# Altium PCB PCB3.PcbDoc
Units mil, origin at the board's own origin, x right, y up, seen from the top; angles counter-clockwise.
Board outline 6000 x 4000 mil, 2 copper layers (Top Layer, Bottom Layer); 46 components, 53 nets, 192 pads, 21 vias.
Unrouted connection lines stored in the file: 2.
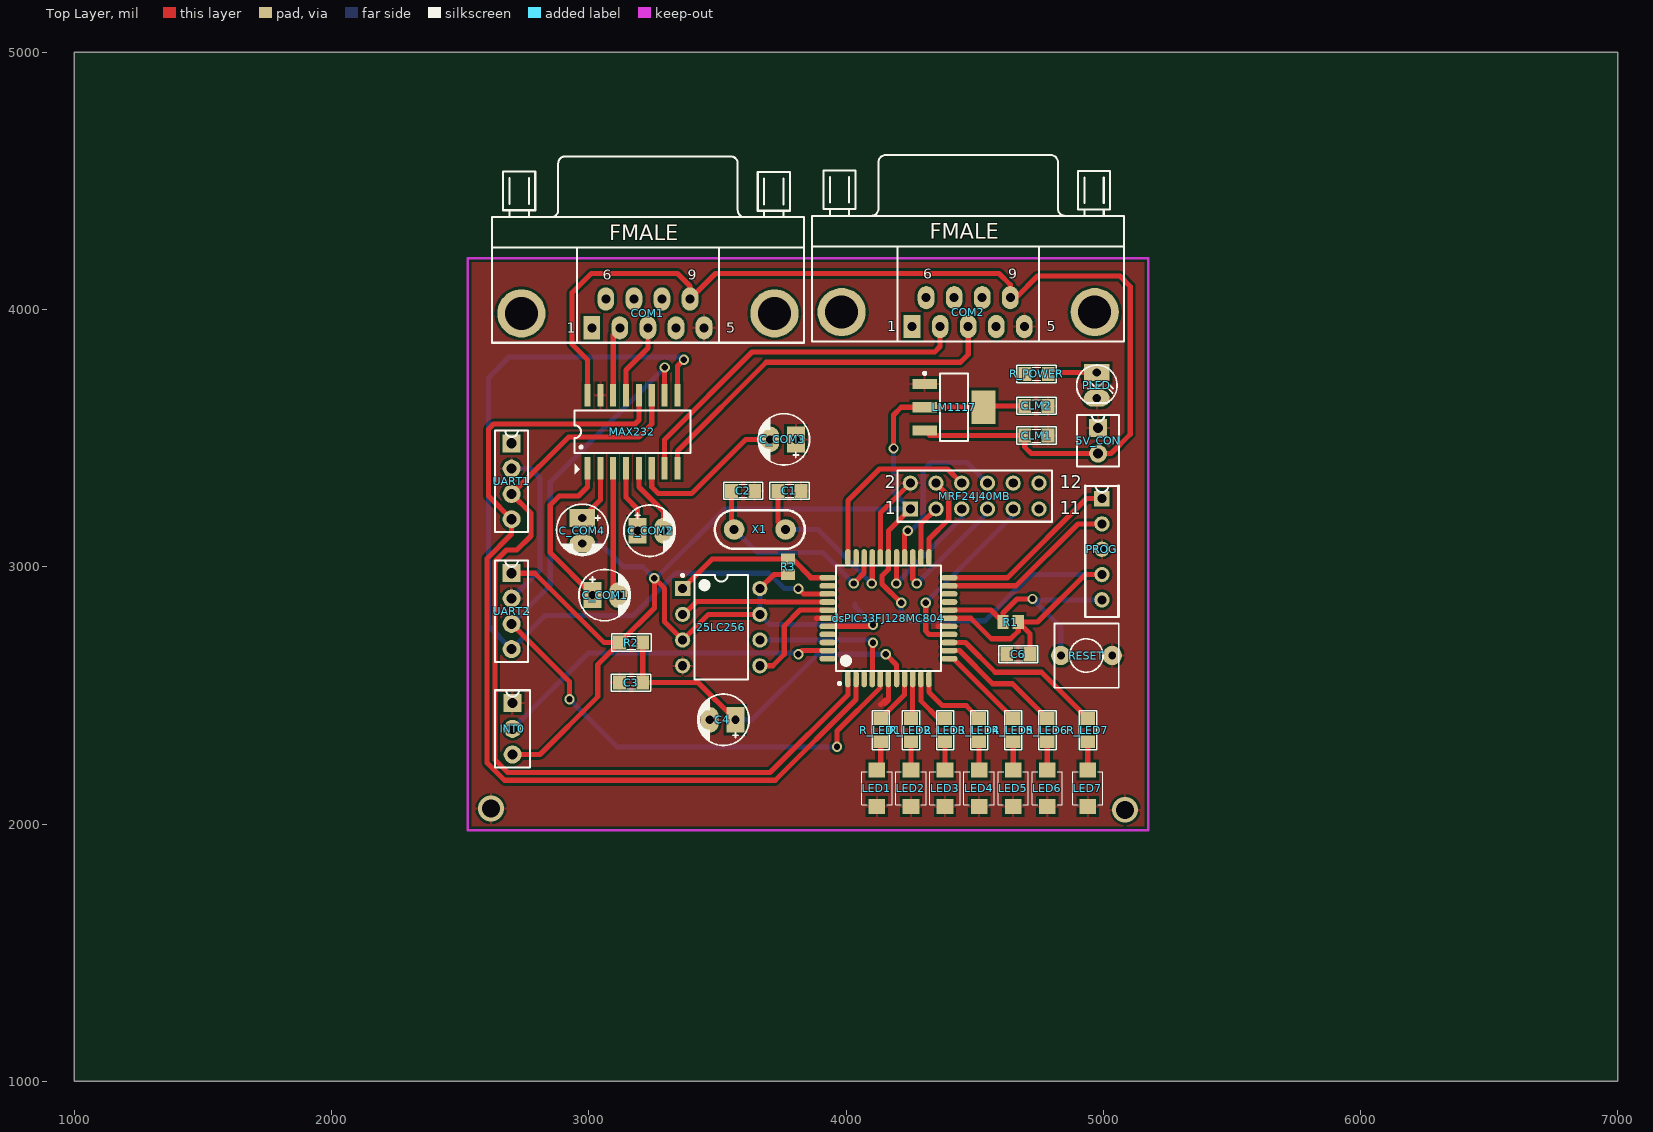
[diagram p0: Top Layer view]
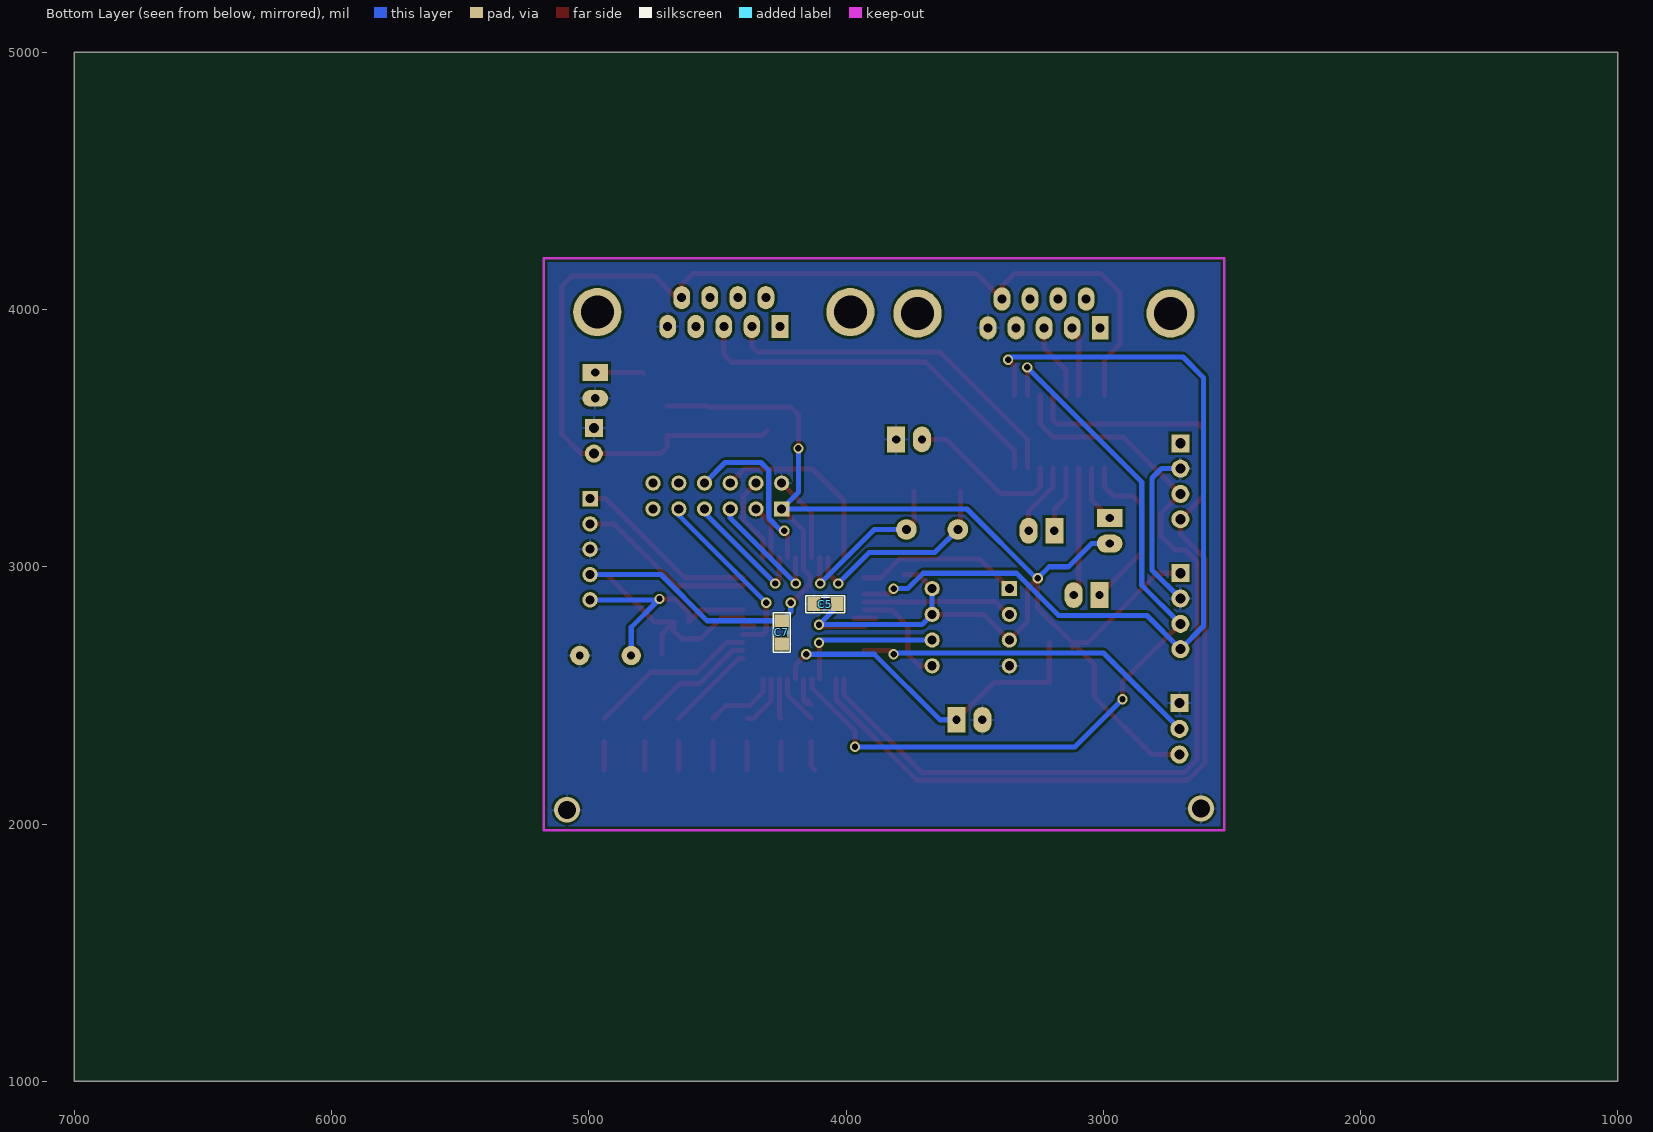
[diagram p1: Bottom Layer view, seen from below]
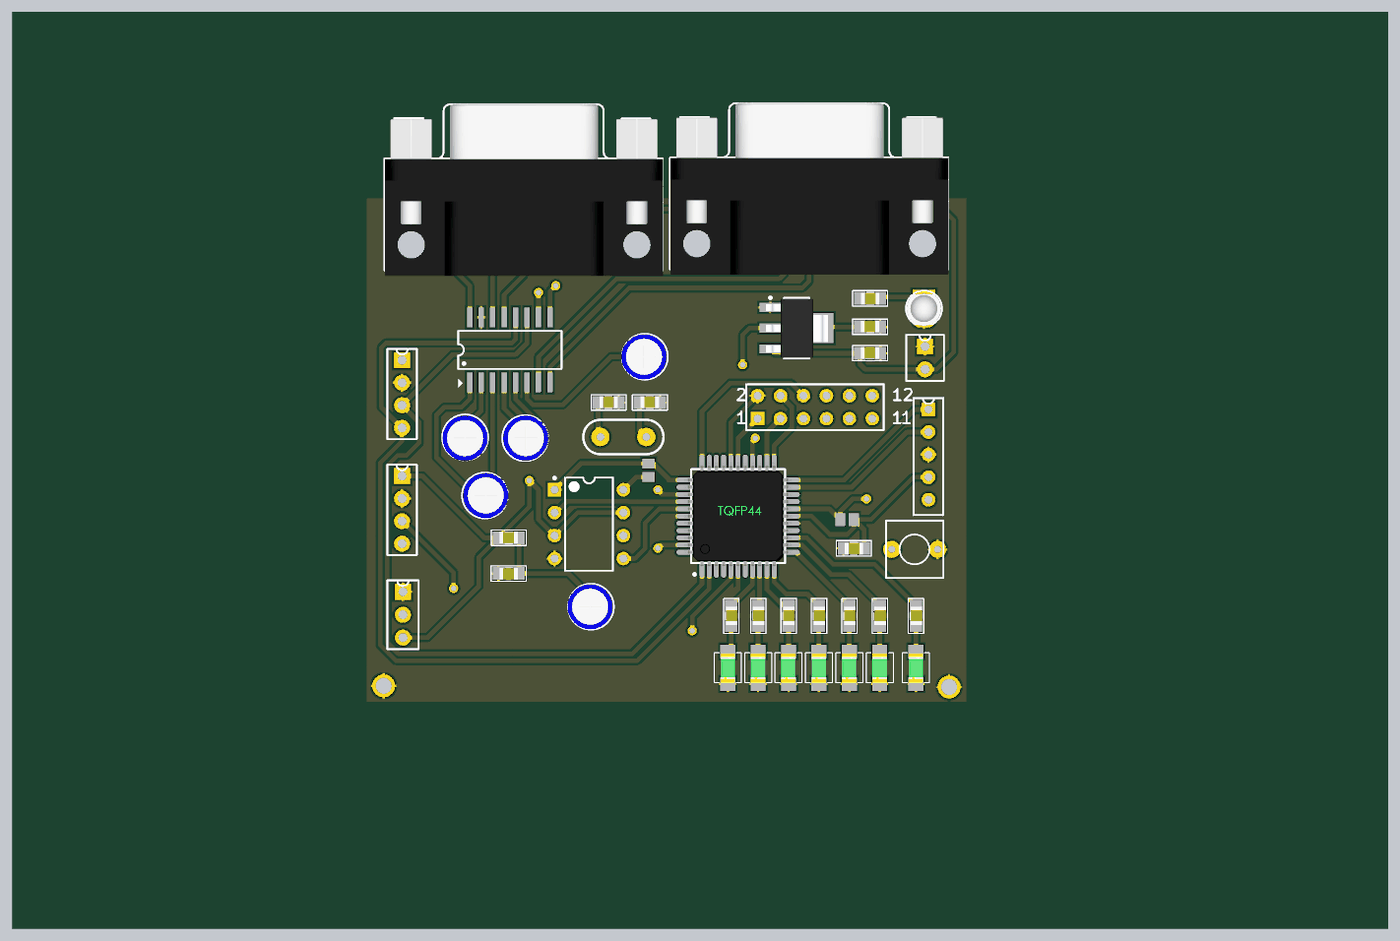
[diagram p2: 3D render of the assembled board from above, using the file's embedded part models]

## Layer stack, top to bottom
Top Layer: signal copper 1.4
Dielectric: dielectric 12.6, FR-4, Dk 4.8
Bottom Layer: signal copper 1.4

## Board outline
1000,1000 7000,1000 7000,5000 1000,5000

## Design rules (kind name [scope] priority, off if disabled: settings)
Clearance CVCC [InNet('VCC')] p1: gap=10
Clearance [All] p2: gap=10
PolygonConnect [All] p1: connectstyle=Relief reliefconductorwidth=10 reliefentries=4 polygonreliefangle="90 Angle"
RoomDefinition Sheet2 [InComponentClass('Sheet2')] p1: confinementstyle=ConfineIn formatcopy=TRUE lockcomponents=FALSE outline 7045,1055 23820,1055 23820,2395 7045,2395
RoutingVias [All] p1: holewidth=28 width=50 viastyle="Through Hole" minholewidth=28 minwidth=50 maxholewidth=28 maxwidth=50
SilkscreenOverComponentPads [All] p1: minsilkscreentomaskgap=10
SolderMaskExpansion [All] p1: expansion=4
Width [All] p1: maxlimit=20 minlimit=10 preferedwidth=20
27 further rules are at their usual default settings.

## Components (designator, comment, footprint, x,y, rotation, side; value= is the part's Value field where it differs from the comment)
5V_CON "JP2" CON2 4980,3540 r0 top
25LC256 "25LC256" DIP-8 3515,2765 r0 top
C1 "103" SM-0805 3780,3295 r180 top
C2 "103" SM-0805 3600,3295 r180 top
C3 "104" SM-0805 3165,2550 r0 top
C4 "10uF" CP1/2 3570,2405 r180 top
C5 "104" SM-0805 4080,2855 r180 bottom
C6 "104" SM-0805 4670,2660 r0 top
C7 "104" SM-0805 4250,2745 r90 bottom
C_COM1 "1uF" CP1/2 3015,2890 r0 top
C_COM2 "1uF" CP1/2 3190,3140 r0 top
C_COM3 "1uF" CP1/2 3805,3495 r180 top
C_COM4 "1uF" CP1/2 2975,3190 r270 top
CLM1 "104" SM-0805 4740,3510 r180 top
CLM2 "104" SM-0805 4740,3625 r180 top
COM1 "COM 9 FMALE" "DSB 9-F" 3230,3985 r0 top
COM2 "COM 9 FMALE" "DSB 9-F" 4475,3990 r0 top
dsPIC33FJ128MC804 "DSPIC33FJ128MC804T-E/PT" TQFP44-10x10-P0.8 4165,2800 r90 top
INT0 "JP3" CON3 2703.94,2470 r0 top
LED1 "LED" SM-LED-Red 4120,2210 r270 top
LED2 "LED" SM-LED-Red 4252.5,2210 r270 top
LED3 "LED" SM-LED-Red 4385,2210 r270 top
LED4 "LED" SM-LED-Red 4517.5,2210 r270 top
LED5 "LED" SM-LED-Red 4650,2210 r270 top
LED6 "LED" SM-LED-Red 4782.5,2210 r270 top
LED7 "LED" SM-LED-Red 4940,2210 r270 top
LM1117 "LM1117" SOT223-4N 4420,3620 r0 top
MAX232 "MAX232" SOP16 3170,3525 r0 top
MRF24J40MB "Header 6X2" HDR2X6 4250,3225 r0 top
PLED "LED" LED-3 4975,3755 r270 top
PROG "JP5" CON5 4995,3265 r0 top
R1 "10k" C0805 4640,2785 r180 top
R2 "1k" SM-0805 3165,2705 r180 top
R3 "Res Semi" C0805 3775,3000 r270 top
R_LED1 "1k" SM-0805 4135,2365 r90 top
R_LED2 "1k" SM-0805 4252.5,2365 r90 top
R_LED3 "1k" SM-0805 4385,2365 r90 top
R_LED4 "1k" SM-0805 4517.5,2365 r90 top
R_LED5 "1k" SM-0805 4650,2365 r90 top
R_LED6 "1k" SM-0805 4782.5,2365 r90 top
R_LED7 "1k" SM-0805 4940,2365 r90 top
R_POWER "1k" SM-0805 4741,3750 r0 top
RESET "SW" SW2 4835,2655 r0 top
UART1 "JP4" CON4 2700,3480 r0 top
UART2 "JP4" CON4 2700,2975 r0 top
X1 "4Mhz" "THACH ANH 12MHz" 3665,3145 r180 top

## Footprints (in the part's own frame and the unit in brackets; to place one, negate y for a bottom-side part, rotate by r counter-clockwise, add the part's x,y. Pads: shape width x height; smd on the part's side, far side on the other; paste and mask are expansions set on the pad)
C0805 [mm] "Chip Capacitor, Body 2.0x1.3mm, IPC High Density"
  rect 1.1x1.4 smd: 1(-0.75,0) 2(0.75,0)
  body extent -1.1,-0.72 1.1,0.72, height 1.4
CON2 [mil]
  rect 70x70 hole 39.37 unplated: 1(0,0)
  round 70 hole 39.37 unplated: 2(0,-100)
  silkscreen extent -82,-150 82,50
CON3 [mil]
  rect 70x70 hole 39.37 unplated: 1(0,0)
  round 70 hole 39.37 unplated: 2(0,-100) 3(0,-200)
  silkscreen extent -68,-250 68,50
CON4 [mil]
  rect 70x70 hole 39.37 unplated: 1(0,0)
  round 70 hole 39.37 unplated: 2(0,-98.43) 3(0,-196.85) 4(0,-295.28)
  silkscreen extent -64,-344 64,49
CON5 [mil]
  rect 60x60 hole 35: 1(0,0)
  round 60 hole 35: 2(0,-98.43) 3(0,-196.85) 4(0,-295.28) 5(0,-393.7)
  silkscreen extent -64,-460 64,49
CP1/2 [mil] "Tu hoa < 22uF/16>50V"
  rect 70x100 hole 32: 1(0,0)
  oval 70x100 hole 32: 2(100,0)
  silkscreen extent -53,-100 147,100, body extent -49,-99 149,99, height 287
DIP-8 [mm] "DIP; 8 Leads; Row Spacing 7.62 mm; Pitch 2.54 mm"
  rect 1.5x1.5 hole 0.9: 1(-3.81,3.81)
  round 1.5 hole 0.9: 2(-3.81,1.27) 3(-3.81,-1.27) 4(-3.81,-3.81) 5(3.81,-3.81) 6(3.81,-1.27) 7(3.81,1.27) 8(3.81,3.81)
  silkscreen extent -3.93,-5.15 2.65,5.23, body extent -3.6,-5.15 3.6,5.15, height 5.08
"DSB 9-F" [mil] "COM FMALE - D Subminiature; 9 Position; Right Angle; Pitch 1.385 mm"
  rect 65x90 hole 35: 1(-218.11,-55.91)
  oval 65x90 hole 35: 2(-109.05,-55.91) 3(0,-55.91) 4(109.05,-55.91) 5(218.11,-55.91) 6(-163.58,55.91) 7(-54.53,55.91) 8(54.53,55.91) 9(163.58,55.91)
  round 187.4 hole 128.35: 10(-491.93,0) 11(491.93,0)
  silkscreen extent -606,-114 606,610, body extent -604,-138 608,613, height 495
HDR2X6 [mm] "Connector; Header; 6x2 Position"
  rect 1.5x1.5 hole 0.9: 1(0,0)
  round 1.5 hole 0.9: 2(0,2.54) 3(2.54,0) 4(2.54,2.54) 5(5.08,0) 6(5.08,2.54) 7(7.62,0) 8(7.62,2.54) 9(10.16,0) 10(10.16,2.54) 11(12.7,0) 12(12.7,2.54)
  silkscreen extent -1.27,-1.27 13.97,3.81
LED-3 [mil] "LED 2 PIN, 3ly Only colour"
  rect 65x100 hole 32: 1(0,0)
  oval 65x100 hole 32: 2(100,0)
  silkscreen extent -29,-78 118,79, body extent -13,-75 125,75, height 217
SM-0805 [mil] "Compoment SMD 80x50mil"
  rect 50x55 smd: 1(-45,0) 2(45,0)
  silkscreen extent -77,-34 76,33, body extent -40,-27 40,23, height 24
SM-LED-Red [mil]
  rect 60x65 smd: 1(0,0) 2(142,0)
  silkscreen extent 6,-59 136,59, body extent 10,-32 136,31, height 44
SOP16 [mm] "Small Outline; 16 Leads; Body Width 5.6 mm; Pitch 1.27 mm"
  rect 0.6x2.2 smd: 1(-4.445,-3.6) 2(-3.175,-3.6) 3(-1.905,-3.6) 4(-0.635,-3.6) 5(0.635,-3.6) 6(1.905,-3.6) 7(3.175,-3.6) 8(4.445,-3.6) 9(4.445,3.6) 10(3.175,3.6) 11(1.905,3.6) 12(0.635,3.6) 13(-0.635,3.6) 14(-1.905,3.6) 15(-3.175,3.6) 16(-4.445,3.6)
  silkscreen extent -5.73,-4.19 5.73,2.1
SOT223-4N [mm] "SOT223, 4-Leads, Body 6.5x3.5mm, Pitch 2.3mm, Lead Span 7mm, IPC Medium Density"
  rect 2.4x1 smd: 1(-2.9,2.3) 2(-2.9,0) 3(-2.9,-2.3)
  rect 2.4x3.3 smd: 4(2.9,0)
  silkscreen extent -3.02,-3.35 1.4,3.47, body extent -3.39,-3.27 3.5,3.23, height 1.72
SW2 [mil] "SW button 2pin, 250x 250 mil"
  round 75 hole 31: 1(0,0) 2(200,0)
  silkscreen extent -25,-125 225,125
"THACH ANH 12MHz" [mil]
  round 80 hole 34: 1(-100,0) 2(100,0)
  silkscreen extent -175,-75 175,75
TQFP44-10x10-P0.8 [mm] "QFP, 44-Leads, Body 10x10mm, Pitch 0.8mm, IPC High Density"
  oval 1.65x0.55 smd: 1(-6,4) 2(-6,3.2) 3(-6,2.4) 4(-6,1.6) 5(-6,0.8) 6(-6,0) 7(-6,-0.8) 8(-6,-1.6) 9(-6,-2.4) 10(-6,-3.2) 11(-6,-4) 23(6,-4) 24(6,-3.2) 25(6,-2.4) 26(6,-1.6) 27(6,-0.8) 28(6,0) 29(6,0.8) 30(6,1.6) 31(6,2.4) 32(6,3.2) 33(6,4)
  oval 0.55x1.65 smd: 12(-4,-6) 13(-3.2,-6) 14(-2.4,-6) 15(-1.6,-6) 16(-0.8,-6) 17(0,-6) 18(0.8,-6) 19(1.6,-6) 20(2.4,-6) 21(3.2,-6) 22(4,-6) 34(4,6) 35(3.2,6) 36(2.4,6) 37(1.6,6) 38(0.8,6) 39(0,6) 40(-0.8,6) 41(-1.6,6) 42(-2.4,6) 43(-3.2,6) 44(-4,6)
  silkscreen extent -6.57,-5.2 5.2,5.2, body extent -5.99,-5.99 6.01,6.01, height 1.07

## Part data
5V_CON: library part Con2, "Connector 2"
C1 C2 C3 C5 C6 C7: library part CM, "Cap SMD"
C4 C_COM1 C_COM2 C_COM3 C_COM4: library part CP1, "Cap P  0,1uF < 22uF , 16 - 50V"
CLM1 CLM2: library part CN2, "Cap np 104 => 105pF"
COM1 COM2: library part DSB9F, "COM 9"
dsPIC33FJ128MC804: "High-Performance 16-bit Digital Signal Controller, 128 KB Flash, 16 KB RAM, 44-Pin TQFP, Extended High Temperature, Tape and Reel"
INT0: library part Con3, "Connector 3"
LED1 LED2 LED3 LED4 LED5 LED6 LED7 PLED: "LED Single colour Green and Red"
LM1117: "3v3"
MAX232: "Dual EIA-232 Driver/Receiver"
MRF24J40MB: "Header, 6-Pin, Dual row"
PROG: library part Con5, "Connector 5"
R1 R2 R_LED1 R_LED2 R_LED3 R_LED4 R_LED5 R_LED6 R_LED7 R_POWER: library part R, "Resistor 1/4W"
R3: "Semiconductor Resistor"
RESET: library part SW4, "Switch button 4 pin"
UART1 UART2: library part Con4, "Connector 4"
X1: library part XT2, "Crystal For all Crystal 2pin."

## Via types
v1: diameter 40, hole 25, Top Layer to Bottom Layer, 18 vias
v2: diameter 100, hole 70, Top Layer to Bottom Layer, 2 vias
v3: diameter 40/40 (per signal layer), hole 25, Top Layer to Bottom Layer, 1 vias

## Nets (pads, with @x,y where several pads share a name; then routed paths per layer and width w, separated by ;. In a path a pad name is that pad's centre, name@x,y a point inside that pad or via, vN(x,y) a via of type N, cw(c..) or ccw(c..) an arc to the next point about the centre after c; other vN are vias at no path point)
5V: 5V_CON.2 CLM1.2 COM1.9 COM2.9 LM1117.3 MAX232.16 | length 4324.5
  Top Layer w20: MAX232.16 2995,3805 2935,3865 2935,4065 3010,4140 3345,4140 3393.58,4091.42 COM1.9 3492.68,4140 4595,4140 4638.58,4096.42 COM2.9 4660.91,4045.91 4745,4130 5065,4130 5105,4090 5105,3515 5030,3440 5V_CON.2 4720,3440 4695,3465 CLM1.2 4325.28,3510 LM1117.3
AN0: dsPIC33FJ128MC804.19
AN1: dsPIC33FJ128MC804.20
CS1: dsPIC33FJ128MC804.33 MRF24J40MB.6 | length 737.3
  Top Layer w20: dsPIC33FJ128MC804.33 4007.52,3257.52 4130,3380 4395,3380 MRF24J40MB.6
CS2: 25LC256.1 dsPIC33FJ128MC804.34 R3.1 | length 663.3
  Top Layer w20: 25LC256.1@3385.47,2915 25LC256.1 3479.53,3029.53 R3.1 3793.44,3029.53 3862.52,2960.45 3862.52,2957.48 dsPIC33FJ128MC804.34
GND: 5V_CON.1 25LC256.4 C1.1 C2.1 C3.1 C4.2 C5.1 C6.1 C7.1 C_COM3.1 CLM1.1 CLM2.1 COM1.5 COM2.5 dsPIC33FJ128MC804.6 dsPIC33FJ128MC804.16 dsPIC33FJ128MC804.29 dsPIC33FJ128MC804.39 INT0.1 LED1.2 LED2.2 LED3.2 LED4.2 LED5.2 LED6.2 LED7.2 LM1117.1 MAX232.15 MRF24J40MB.2 PLED.2 PROG.3 RESET.2 UART1.2 UART2.2 | length 1242.3
  Top Layer w20: 3885,2800 dsPIC33FJ128MC804.39 3969.18,2800 ; dsPIC33FJ128MC804.29 4133.5,3208.5 MRF24J40MB.2 ; 4135,2464 4153.43,2482.43 4165,2482.43 ; 4151.39,2468.82 4165,2482.43 ; dsPIC33FJ128MC804.6 4165,2482.43 ; 4357.5,2768.5 dsPIC33FJ128MC804.16
  Bottom Layer w20: UART2.2 2810,2986.57 2810,3345 2773.43,3381.57 UART1.2
  other v2: 5085,2055 2620,2060
INT0: dsPIC33FJ128MC804.43 INT0.2 | length 1354.5
  Top Layer w20: v1(3815,2660) 3829.02,2674.02 dsPIC33FJ128MC804.43
  Bottom Layer w20: INT0.2 2998.46,2664.53 3810.47,2664.53 v1(3815,2660)
INT1: dsPIC33FJ128MC804.27 MRF24J40MB.5 | length 497.5
  Top Layer w20: v1(4195,2935) 4196.5,2936.5 dsPIC33FJ128MC804.27
  Bottom Layer w20: v1(4195,2935) 4450,3190 MRF24J40MB.5
LED1: dsPIC33FJ128MC804.8 R_LED1.2 | length 192.3
  Top Layer w20: R_LED1.2 4227.32,2502.32 4227.32,2563.11 dsPIC33FJ128MC804.8
LED2: dsPIC33FJ128MC804.9 R_LED2.2 | length 156.7
  Top Layer w20: R_LED2.2 4258.82,2416.32 4258.82,2563.11 dsPIC33FJ128MC804.9
LED3: dsPIC33FJ128MC804.10 R_LED3.2 | length 207.4
  Top Layer w20: dsPIC33FJ128MC804.10 4290.98,2479.02 4360,2410 R_LED3.2
LED4: dsPIC33FJ128MC804.11 R_LED4.2 | length 288.7
  Top Layer w20: dsPIC33FJ128MC804.11 4322.48,2512.52 4375,2460 4467.5,2460 R_LED4.2
LED5: dsPIC33FJ128MC804.12 R_LED5.2 | length 345.1
  Top Layer w20: dsPIC33FJ128MC804.12 4417.48,2642.52 R_LED5.2
LED6: dsPIC33FJ128MC804.13 R_LED6.2 | length 490.6
  Top Layer w20: dsPIC33FJ128MC804.13 4440.98,2674.02 4570,2545 4647.5,2545 R_LED6.2
LED7: dsPIC33FJ128MC804.14 R_LED7.2 | length 661.2
  Top Layer w20: dsPIC33FJ128MC804.14 4464.49,2705.51 4580,2590 4760,2590 R_LED7.2
NetC_COM1_1: C_COM1.1 MAX232.1 | length 665.6
  Top Layer w20: MAX232.1 2995,3310 2960,3275 2885,3275 2850,3240 2850,3055 C_COM1.1
NetC_COM1_2: C_COM1.2 MAX232.3 | length 501.6
  Top Layer w20: MAX232.3 3095,2910 C_COM1.2
NetC_COM2_1: C_COM2.1 MAX232.4 | length 261.9
  Top Layer w20: MAX232.4 3145,3270 3190,3225 C_COM2.1
NetC_COM2_2: C_COM2.2 MAX232.5 | length 282.6
  Top Layer w20: MAX232.5 3195,3310 3290,3215 C_COM2.2
NetC_COM3_2: C_COM3.2 MAX232.6 | length 630.6
  Top Layer w20: MAX232.6 3245,3310 3270,3285 3400,3285 3610,3495 C_COM3.2
NetC_COM4_1: C_COM4.1 MAX232.2 | length 222.3
  Top Layer w20: C_COM4.1 3045,3260 MAX232.2
NetLED1_1: LED1.1 R_LED1.1 | length 116.2
  Top Layer w20: LED1.1 4135,2225 R_LED1.1
NetLED2_1: LED2.1 R_LED2.1 | length 110
  Top Layer w20: LED2.1 R_LED2.1
NetLED3_1: LED3.1 R_LED3.1 | length 110
  Top Layer w20: LED3.1 R_LED3.1
NetLED4_1: LED4.1 R_LED4.1 | length 110
  Top Layer w20: LED4.1 R_LED4.1
NetLED5_1: LED5.1 R_LED5.1 | length 110
  Top Layer w20: LED5.1 R_LED5.1
NetLED6_1: LED6.1 R_LED6.1 | length 110
  Top Layer w20: LED6.1 R_LED6.1
NetLED7_1: LED7.1 R_LED7.1 | length 110
  Top Layer w20: LED7.1 R_LED7.1
NetPLED_1: PLED.1 R_POWER.2 | length 191.1
  Top Layer w20: R_POWER.2 4791,3755 PLED.1
OSC1: C1.2 dsPIC33FJ128MC804.30 X1.1 | length 686.5
  Top Layer w20: C1.2 3735,3175 X1.1 ; v1(4100,2935) 4102.01,2937.01 dsPIC33FJ128MC804.30
  Bottom Layer w20: X1.1 3890,3145 v1(4100,2935)
OSC2: C2.2 dsPIC33FJ128MC804.31 X1.2 | length 824.1
  Top Layer w20: C2.2 3555,3155 X1.2 ; v1(4030,2935) 4070.51,2975.51 dsPIC33FJ128MC804.31
  Bottom Layer w20: X1.2 3655,3055 3910,3055 v1(4030,2935)
PGC: dsPIC33FJ128MC804.22 PROG.1 | length 721.2
  Top Layer w20: dsPIC33FJ128MC804.22 4627.48,2957.48 4935,3265 PROG.1
PGD: dsPIC33FJ128MC804.21 PROG.2 | length 693.4
  Top Layer w20: dsPIC33FJ128MC804.21 4660.98,2925.98 4901.57,3166.57 PROG.2
R1IN: COM1.3 MAX232.13 | length 297.6
  Top Layer w20: MAX232.13 3145,3765 3230,3850 COM1.3
R1OUT: dsPIC33FJ128MC804.2 MAX232.12 UART1.4 | length 3742.1
  Top Layer w20: MAX232.12 3195,3570 3180,3555 2630,3555 2610,3535 2610,3274.72 UART1.4 2700,3127.43 2605,3032.43 2605,2237.57 2672.57,2170 3725,2170 4039.02,2484.02 dsPIC33FJ128MC804.2
R2IN: COM2.3 MAX232.8 | length 1461.2
  Top Layer w20: MAX232.8 3345,3450 3690,3795 4445,3795 4475,3825 COM2.3
R2OUT: dsPIC33FJ128MC804.36 MAX232.9 UART2.4 | length 3422.9
  Top Layer w20: MAX232.9 3345,3780 v1(3370,3805) ; v1(3815,2915) 3835.51,2894.49 dsPIC33FJ128MC804.36
  Bottom Layer w20: v1(3370,3805) 3360,3815 2690,3815 2610,3735 2610,2769.72 UART2.4 2830.28,2810 3172.66,2810 3337.66,2975 3700,2975 3760,2915 v1(3815,2915)
RP2_WAKE: dsPIC33FJ128MC804.23 MRF24J40MB.4 | length 341.2
  Top Layer w20: dsPIC33FJ128MC804.23 4322.48,3107.48 4399.53,3184.53 4399.53,3275.47 MRF24J40MB.4
RP3_RSTMRF: dsPIC33FJ128MC804.24 MRF24J40MB.3 | length 213.2
  Top Layer w20: dsPIC33FJ128MC804.24 4290.98,3165.98 MRF24J40MB.3
RP23: dsPIC33FJ128MC804.3
SCK1: dsPIC33FJ128MC804.15 MRF24J40MB.9 | length 713.4
  Top Layer w20: v1(4310,2860) 4310,2750 4322.99,2737.01 dsPIC33FJ128MC804.15 dsPIC33FJ128MC804.15@4400.55,2736.34
  Bottom Layer w20: v1(4310,2860) 4650,3200 MRF24J40MB.9
SCK2: 25LC256.6 dsPIC33FJ128MC804.4 | length 593.7
  Top Layer w20: dsPIC33FJ128MC804.4 4102.68,2564.45 4102.68,2702.68 v1(4105,2705)
  Bottom Layer w20: 25LC256.6@3670,2720 25LC256.6 4095,2715 v1(4105,2705)
SDI1: dsPIC33FJ128MC804.26 MRF24J40MB.8 | length 671.4
  Top Layer w20: dsPIC33FJ128MC804.26 4227.99,3127.99 v1(4240,3140)
  Bottom Layer w20: v1(4240,3140) 4252.34,3140 4299.53,3187.19 4299.53,3199.01 4300.47,3199.96 4300.47,3375.47 4330,3405 4470,3405 MRF24J40MB.8
SDI2: 25LC256.2 dsPIC33FJ128MC804.37 | length 585.3
  Top Layer w20: 25LC256.2 3370,2815 3420,2865 3420.47,2864.53 3685.51,2864.53 3687.05,2862.99 dsPIC33FJ128MC804.37
SDO1: dsPIC33FJ128MC804.25 MRF24J40MB.7 | length 511.6
  Top Layer w20: dsPIC33FJ128MC804.25 4259.49,2950.51 v3(4275,2935)
  Bottom Layer w20: v3(4275,2935) 4550,3210 MRF24J40MB.7
SDO2: 25LC256.5 dsPIC33FJ128MC804.38 | length 418.8
  Top Layer w20: 25LC256.5@3665,2615.94 25LC256.5 3715,2615 3760,2660 3760,2770 3821.5,2831.5 dsPIC33FJ128MC804.38
T1IN: dsPIC33FJ128MC804.1 MAX232.11 UART1.3 | length 3494.8
  Top Layer w20: MAX232.11 3245,3555 3195,3505 2921.85,3505 UART1.3 2775,3208.15 2775,3120 2720,3065 2680,3065 2635,3020 2635,2250 2685,2200 3705,2200 4007.52,2502.52 dsPIC33FJ128MC804.1
T1OUT: COM1.2 MAX232.14 | length 273.1
  Top Layer w20: MAX232.14 3095,3903.15 COM1.2
T2IN: dsPIC33FJ128MC804.5 MAX232.10 UART2.3 | length 3188.1
  Top Layer w20: UART2.3 2925,2553.15 v1(2925,2485) ; MAX232.10 v1(3295,3775) ; v1(3965,2300) 3965,2361.52 4132.83,2529.36 4132.83,2563.11 dsPIC33FJ128MC804.5
  Bottom Layer w20: UART2.3 2850,2928.15 2850,3330 v1(3295,3775) ; v1(2925,2485) 3110,2300 v1(3965,2300)
T2OUT: COM2.2 MAX232.7 | length 1410.3
  Top Layer w20: MAX232.7 3295,3495 3635,3835 4345,3835 4365.94,3855.95 COM2.2
VCAP: C3.2 C4.1 dsPIC33FJ128MC804.7 R2.1 | length 1379.1
  Top Layer w20: R2.1 C3.2 3425,2550 C4.1 ; v1(4155,2660) 4196.5,2618.5 dsPIC33FJ128MC804.7
  Bottom Layer w20: C4.1 3635,2405 3890,2660 v1(4155,2660)
VCC: 25LC256.3 25LC256.7 25LC256.8 C5.2 C6.2 C7.2 C_COM4.2 CLM2.2 dsPIC33FJ128MC804.17 dsPIC33FJ128MC804.28 dsPIC33FJ128MC804.40 INT0.3 LM1117.2 LM1117.4 MRF24J40MB.1 PROG.4 R1.1 R2.2 R3.2 R_POWER.1 UART1.1 UART2.1 | length 7751.7
  Top Layer w20: UART2.1 2790,2975 3060,2705 R2.2 ; INT0.3 2810,2270 3035,2495 3035,2620 R2.2 ; R2.2@3120,2686.06 R2.2 ; 25LC256.8@3654.53,2915 25LC256.8 3720.47,2970.47 R3.2 ; 25LC256.7 3465,2815 25LC256.3 3295,2785 3295,2915 v1(3255,2955) 3255,2840 R2.2 ; dsPIC33FJ128MC804.40 4098.5,2768.5 v1(4105,2775) ; v1(4185,3460) 4185,3590 4215,3620 LM1117.2 LM1117.4 4539.17,3625 CLM2.2 ; v1(4215,2860) 4213.43,2860 4140,2933.43 4140,2965 4165,2990 dsPIC33FJ128MC804.28 4165,3140 MRF24J40MB.1 ; dsPIC33FJ128MC804.17 4485,2800 4565,2720 4640,2720 4669.53,2749.53 R1.1 ; C6.2 4715,2739.53 R1.1 ; PROG.4 4929.72,2969.72 4745,2785 R1.1
  Bottom Layer w20: UART1.1@2690,3480 UART1.1 ; C_COM4.2 3045,3090 3135,3000 3210,3000 v1(3255,2955) 3260,2955 3530,3225 MRF24J40MB.1 4185,3290 v1(4185,3460) ; 25LC256.8 25LC256.7 3705,2775 v1(4105,2775) 4035,2845 C5.2 ; v1(4215,2860) 4215,2825 C7.2 4540,2790 4719.72,2969.72 PROG.4
VPP: dsPIC33FJ128MC804.18 PROG.5 R1.2 RESET.1 | length 933
  Top Layer w20: dsPIC33FJ128MC804.18 4563.98,2831.5 R1.2 4610.47,2820.47 4665,2875 v1(4725,2875)
  Bottom Layer w20: v1(4725,2875) v1@4728.7,2871.3 ; RESET.1 4835,2765 v1@4728.7,2871.3 ; PROG.5 v1@4728.7,2871.3
pads on no net: COM1.1 COM1.4 COM1.6 COM1.7 COM1.8 COM1.10 COM1.11 COM2.1 COM2.4 COM2.6 COM2.7 COM2.8 COM2.10 COM2.11 dsPIC33FJ128MC804.32 dsPIC33FJ128MC804.35 dsPIC33FJ128MC804.41 dsPIC33FJ128MC804.42 dsPIC33FJ128MC804.44 MRF24J40MB.10 MRF24J40MB.11 MRF24J40MB.12

## Polygon pours and split planes (outlines as drawn)
GND on Top Layer "Top Layer-No Net" (solid, remove dead copper, pour order 4): 2537,4200 2530,4193 2530,1975 5175,1975 5175,4200 2530,4200
GND on Bottom Layer "Top Layer-No Net" (solid, remove dead copper, pour order 6): 2530,4200 5175,4200 5175,1975 2530,1975 2530,4190 2540,4200

## Keep-outs
Keep-Out Layer:
  lines w10: 2530,1975 5150,1975 5175,1975 5175,4200 2530,4200 2530,1975

## Text inside footprints (layer, text, board x,y; h text height)
COM1: Top Overlay "FMALE" at 3080,4270 h60; Top Overlay "6" at 3055,4115 h40; Top Overlay "9" at 3385,4115 h40; Top Overlay "5" at 3535,3910 h40; Top Overlay "1" at 2915,3910 h40
COM2: Top Overlay "FMALE" at 4325,4275 h60; Top Overlay "6" at 4300,4120 h40; Top Overlay "9" at 4630,4120 h40; Top Overlay "5" at 4780,3915 h40; Top Overlay "1" at 4160,3915 h40
MRF24J40MB: Top Overlay "12" at 4830,3305 h50; Top Overlay "1" at 4870,3205 h50; Top Overlay "1" at 4830,3205 h50; Top Overlay "1" at 4150,3205 h50; Top Overlay "2" at 4150,3305 h50